# EAGLE board zegarek_v1.3 (EAGLE 6.2)
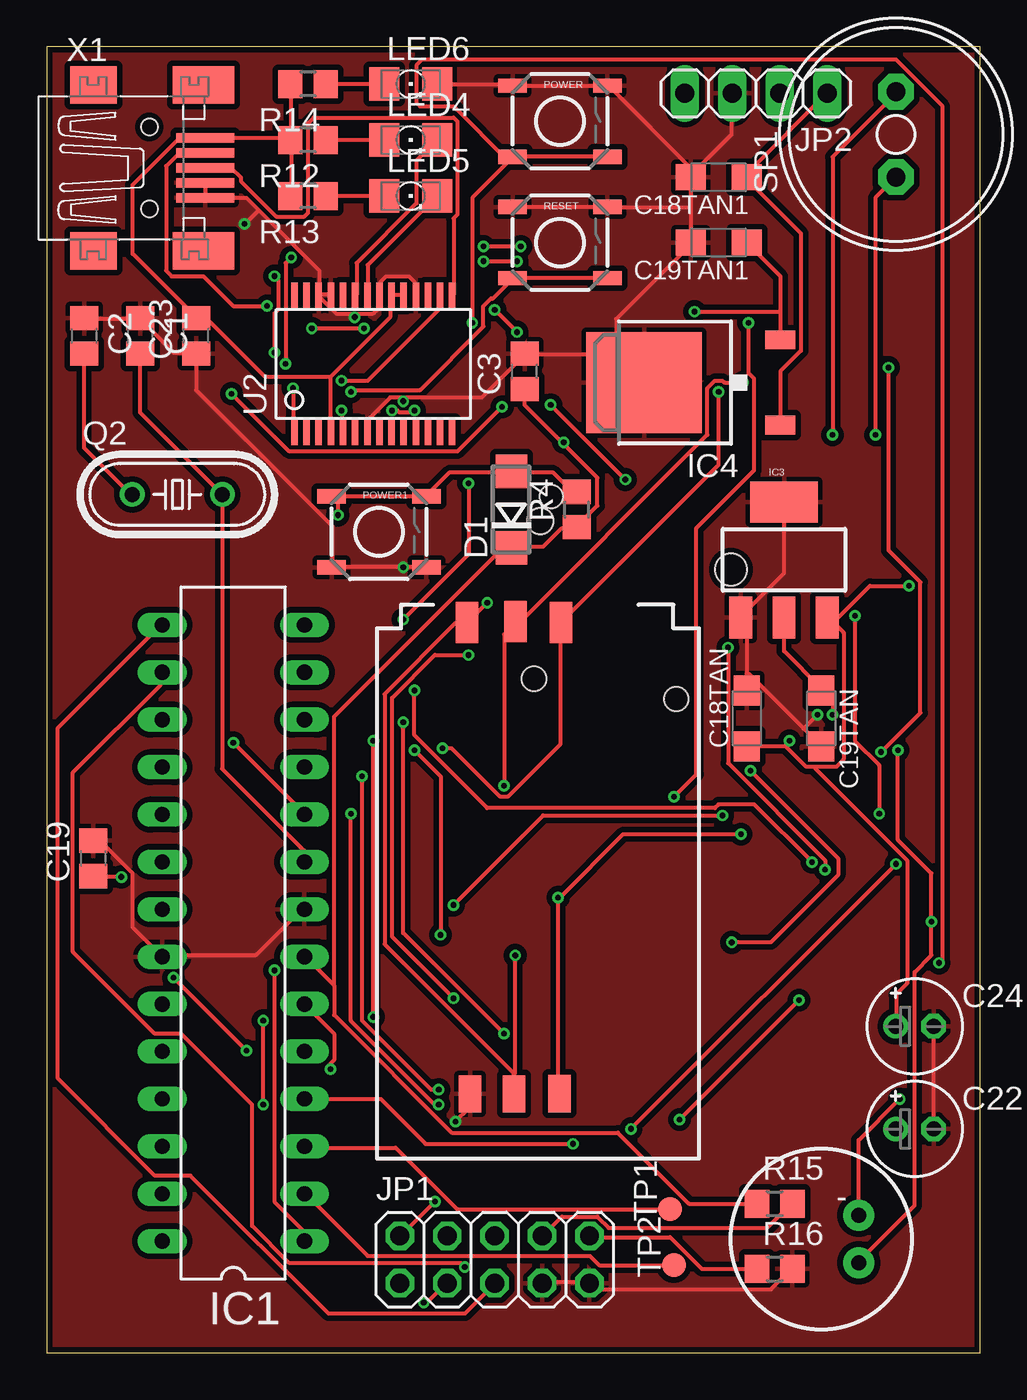
[diagram p0: board, top side]
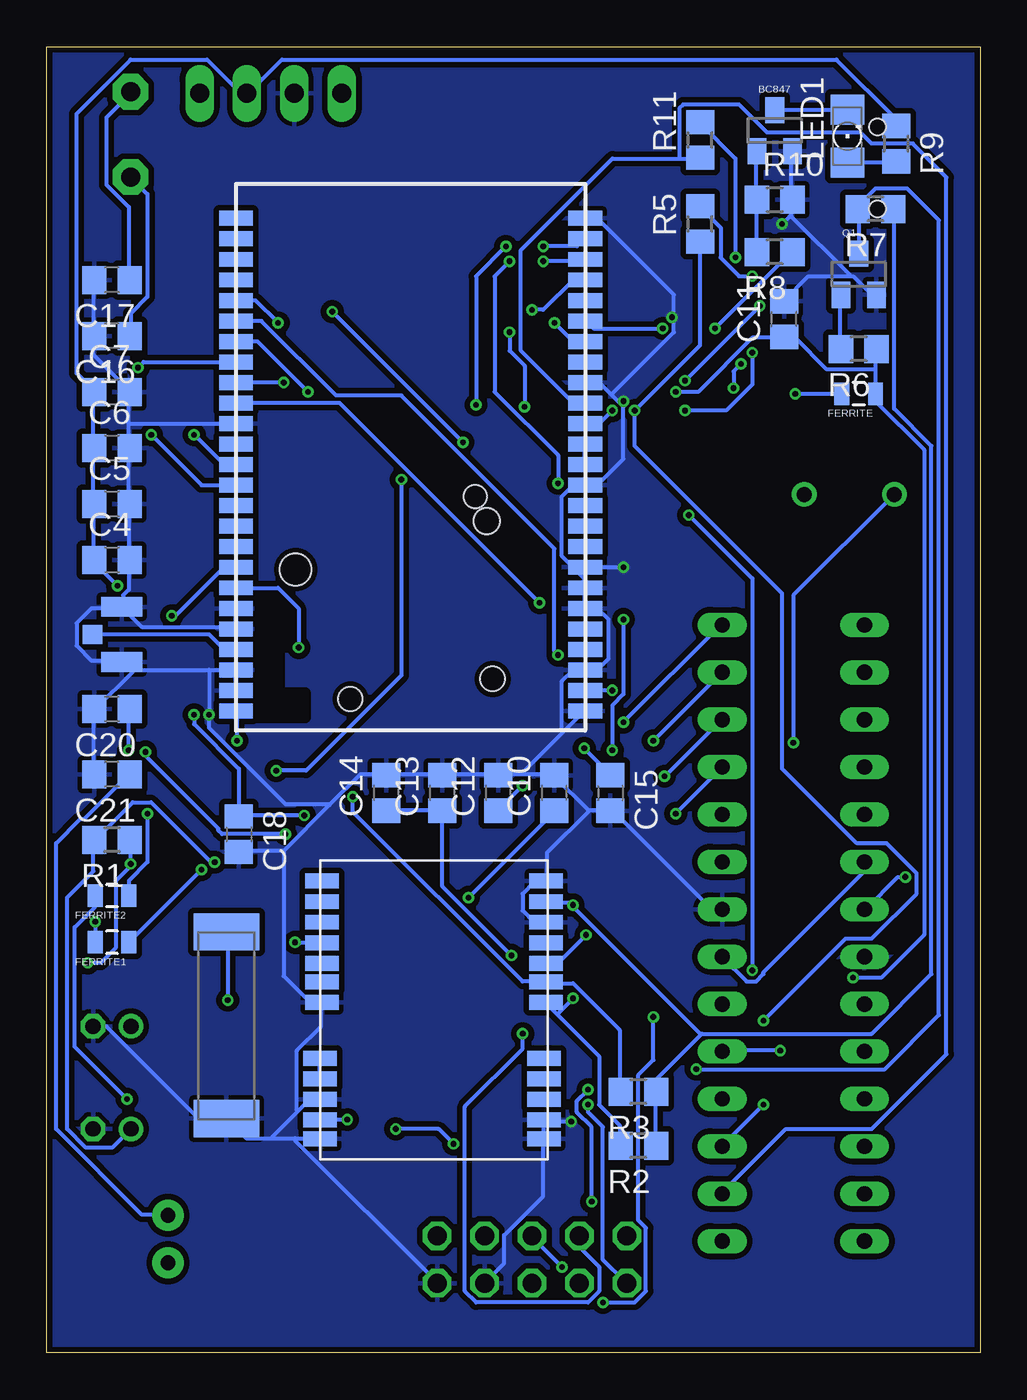
[diagram p1: board, bottom side, seen from below]

Size 50 x 70 mm. Coordinates in mm from the lower left corner, seen from the top.
Outline: 0,0 50,0 50,70 0,70 0,0
Copper layers (1*16): Top 0.035mm / dielectric 1.5mm / Bottom 0.035mm
Design rules: minimum track width 6mil, minimum drill 12mil, track to track 6mil, track to pad 6mil, pad to pad 6mil, via to via 6mil, smd to smd 0mil, copper to edge 10mil, drill to drill 10mil, minimum pad ring 10mil, minimum via ring 6mil, stop-mask expansion 2mil, vias tented up to drill 100mil, thermal gap 10mil
Net classes: 0 default: width 0.203 mm

## Footprints (pad centres in the part's own frame; a part is rotated, then mirrored left to right if it is on the bottom)
SOT23 = smd 1 x 1.4: 1 -0.95,-1.1; 2 0.95,-1.1; 3 0,1.1
C0805 = smd 1.3 x 1.5: 1 -0.95,0; 2 0.95,0
SMC_A = smd 1.6 x 1.4: + -1.5,0; - 1.5,0
E2-5 = drill 0.813 pad 1.27: + -1.016,0 | drill 0.813 pad 1.27 octagon: - 1.016,0
DO214AC = smd 1.8 x 1.7: A 2.05,0; C -2.05,0
0805 = smd 0.8 x 1.2: 1 -0.9,0; 2 0.9,0
LEON-G100/G200 = smd 1.8 x 0.8: 1 -9.35,13.6; 2 -9.35,12.5; 3 -9.35,11.4; 4 -9.35,10.3; 5 -9.35,9.2; 6 -9.35,8.1; 7 -9.35,7; 8 -9.35,5.9; 9 -9.35,4.8; 10 -9.35,3.7; 11 -9.35,2.6; 12 -9.35,1.5; 13 -9.35,0.4; 14 -9.35,-0.7; 15 -9.35,-1.8; 16 -9.35,-2.9; 17 -9.35,-4; 18 -9.35,-5.1; 19 -9.35,-6.2; 20 -9.35,-7.3; 21 -9.35,-8.4; 22 -9.35,-9.5; 23 -9.35,-10.6; 24 -9.35,-11.7; 25 -9.35,-12.8; 26 9.35,-12.8; 27 9.35,-11.7; 28 9.35,-10.6; 29 9.35,-9.5; 30 9.35,-8.4; 31 9.35,-7.3; 32 9.35,-6.2; 33 9.35,-5.1; 34 9.35,-4; 35 9.35,-2.9; 36 9.35,-1.8; 37 9.35,-0.7; 38 9.35,0.4; 39 9.35,1.5; 40 9.35,2.6; 41 9.35,3.7; 42 9.35,4.8; 43 9.35,5.9; 44 9.35,7; 45 9.35,8.1; 46 9.35,9.2; 47 9.35,10.3; 48 9.35,11.4; 49 9.35,12.5; 50 9.35,13.6 | hole 1.31: -4.39,11.88 | hole 1.29: 3.23,12.96 | hole 1.7: 6.16,6.02 | hole 1.4: -4.07,3.42 | hole 1.24: -3.47,2.12
GPS1003 = smd 3.5 x 2: FEED 0.23,4.96; GND 0.23,-5.04
DIL28-3 = drill 0.813 long: 1 -16.51,-3.81; 2 -13.97,-3.81; 3 -11.43,-3.81; 4 -8.89,-3.81; 5 -6.35,-3.81; 6 -3.81,-3.81; 7 -1.27,-3.81; 8 1.27,-3.81; 9 3.81,-3.81; 10 6.35,-3.81; 11 8.89,-3.81; 12 11.43,-3.81; 13 13.97,-3.81; 14 16.51,-3.81; 15 16.51,3.81; 16 13.97,3.81; 17 11.43,3.81; 18 8.89,3.81; 19 6.35,3.81; 20 3.81,3.81; 21 1.27,3.81; 22 -1.27,3.81; 23 -3.81,3.81; 24 -6.35,3.81; 25 -8.89,3.81; 26 -11.43,3.81; 27 -13.97,3.81; 28 -16.51,3.81
SOT223 = smd 1.219 x 2.235: 1 -2.311,-3.099; 2 0,-3.099; 3 2.311,-3.099 | smd 3.6 x 2.2: 4 0,3.099
DPACK_3 = smd 1 x 1.6: 1 -2.28,-4.8; 3 2.28,-4.8 | smd 5.4 x 6.2: 4 0,2.5
2X05 = drill 1.016 octagon: 1 -5.08,-1.27; 2 -5.08,1.27; 3 -2.54,-1.27; 4 -2.54,1.27; 5 0,-1.27; 6 0,1.27; 7 2.54,-1.27; 8 2.54,1.27; 9 5.08,-1.27; 10 5.08,1.27
1X04 = drill 1.016 long: 1 -3.81,0; 2 -1.27,0; 3 1.27,0; 4 3.81,0
1206 = smd 1.6 x 1.803: A -1.422,0; C 1.422,0
TACTILE_SWITCH_SMD = smd 1.524 x 0.762: 1 -2.54,1.905; 2 2.54,1.905; 3 -2.54,-1.905; 4 2.54,-1.905
HC49/S = drill 0.813: 1 -2.413,0; 2 2.413,0
R0805 = smd 1.3 x 1.5: 1 -0.95,0; 2 0.95,0
AL11P = drill 1.016 pad 1.905 octagon: + 2.286,0; - -2.286,0
TP13R = smd 1.3 x 1.3: TP 0,0
SSOP28DB = smd 0.348 x 1.397: 1 -4.225,-3.656; 2 -3.575,-3.656; 3 -2.925,-3.656; 4 -2.275,-3.656; 5 -1.625,-3.656; 6 -0.975,-3.656; 7 -0.325,-3.656; 8 0.325,-3.656; 9 0.975,-3.656; 10 1.625,-3.656; 11 2.275,-3.656; 12 2.925,-3.656; 13 3.575,-3.656; 14 4.225,-3.656; 15 4.225,3.656; 16 3.575,3.656; 17 2.925,3.656; 18 2.275,3.656; 19 1.625,3.656; 20 0.975,3.656; 21 0.325,3.656; 22 -0.325,3.656; 23 -0.975,3.656; 24 -1.625,3.656; 25 -2.275,3.656; 26 -2.925,3.656; 27 -3.575,3.656; 28 -4.225,3.656
SIMHOLDER3 = smd 2.2 x 1.2: 1 0.95,4.81; 2 0.91,7.41; 3 0.95,9.86 | smd 2 x 1.2: 4 26.2,9.78; 5 26.22,7.34; 6 26.22,4.98
MIC-9.7MM = drill 0.8 pad 1.676: 1 -2,1.27; 2 -2,-1.27
RF-IPX1 = smd 1 x 1.05: FEED 0,-1.05 | smd 1.05 x 2.2: GND 1.475,0.525; GND1 -1.475,0.525
NEO-6M = smd 0.8 x 1.8: CFG_GPS0/SCK -3.32,-6.15; EXTINT0 3.98,5.75; GND -4.42,5.85; GND1 -6.52,5.85; GND2 -6.52,-6.15; GND3 7.28,-6.25; MISO/CFG_COM1 -4.42,-6.15; MOSI/CFG_COM0 -5.52,-6.15; RESERVED 7.28,5.75; RESERVED1 -2.22,5.85; RESERVED2 -2.22,-6.15; RF_IN -5.52,5.85; RXD1 3.98,-6.25; SCL2 1.88,-6.25; SDA2 0.78,-6.25; SS_N 6.18,5.75; TIMEPULSE 5.08,5.75; TXD1 2.88,-6.25; USB_DM 2.88,5.75; USB_DP 1.88,5.75; V_BCKP 5.08,-6.25; VCC 6.18,-6.25; VCC_REF -3.32,5.85; VDD_USB 0.78,5.75
32005-301 = smd 3.1 x 0.5: 1 3,1.6; 2 3,0.8; 3 3,0; 4 3,-0.8; 5 3,-1.6 | smd 2.5 x 2: M1 -3,-4.45; M2 -3,4.45 | smd 3.3 x 2: M3 2.9,4.45; M4 2.9,-4.45 | hole 0.9: 0,2.2; 0,-2.2

## Placement (x,y rotation side)
BC847  [SOT23]  11,65.5 0 bottom
C1  22pF  [C0805]  5,54.5 270 top
C2  22pF  [C0805]  2,54.5 270 top
C3  100nF  [C0805]  25.6,52.6 90 top
C4  39pF  [C0805]  46.5,42.5 0 bottom
C5  10pF  [C0805]  46.5,45.5 0 bottom
C6  10nF  [C0805]  46.5,48.5 0 bottom
C7  100nF  [C0805]  46.5,51.5 0 bottom
C10  47pF  [C0805]  22.8,30 90 bottom
C11  47pF  [C0805]  10.5,55.4 90 bottom
C12  47pF  [C0805]  25.8,30 90 bottom
C13  47pF  [C0805]  28.8,30 90 bottom
C14  100nF  [C0805]  31.8,30 90 bottom
C15  47pF  [C0805]  19.8,30 270 bottom
C16  27pF  [C0805]  46.5,54.5 180 bottom
C17  27pF  [C0805]  46.5,57.5 180 bottom
C18  100nF  [C0805]  39.7,27.8 270 bottom
C18TAN  10uF  [SMC_A]  37.5,34 90 top
C18TAN1  10uF  [SMC_A]  36,63 180 top
C19  100nF  [C0805]  2.5,26.5 90 top
C19TAN  10uF  [SMC_A]  41.5,34 270 top
C19TAN1  10uF  [SMC_A]  36,59.5 180 top
C20  27pF  [C0805]  46.5,34.5 180 bottom
C21  27pF  [C0805]  46.5,31 180 bottom
C22  [E2-5]  46.5,12 0 top
C23  100nF  [C0805]  8,54.5 90 top
C24  [E2-5]  46.5,17.5 0 top
D1  GS1B  [DO214AC]  24.9,45.2 90 top
FERRITE  [0805]  6.5,51.4 180 bottom
FERRITE1  82nH  [0805]  46.5,22 180 bottom
FERRITE2  82nH  [0805]  46.5,24.5 180 bottom
G1  LEON-G100/G200  [LEON-G100/G200]  30.5,48 180 bottom
GPS1003  GPS1003  [GPS1003]  40.6,17.6 0 bottom
IC1  MEGA8-P  [DIL28-3]  10,22.5 90 top
IC3  LM1117S-3.3  [SOT223]  39.5,42.5 0 top
IC4  NCV78M05BDTRKG  [DPACK_3]  34.5,52 90 top
JP1  [2X05]  24,5 0 top
JP2  [1X04]  38,67.5 180 top
LED1  [1206]  7.1,65.2 90 bottom
LED4  [1206]  19.5,65 0 top
LED5  [1206]  19.5,62 0 top
LED6  [1206]  19.5,68 0 top
POWER  [TACTILE_SWITCH_SMD]  27.5,66 0 top
POWER1  [TACTILE_SWITCH_SMD]  17.8,44 0 top
Q1  [SOT23]  6.5,57.8 0 bottom
Q2  [HC49/S]  7,46 0 top
R1  100k  [R0805]  46.5,27.5 180 bottom
R2  4.7k  [R0805]  18.3,11.1 180 bottom
R3  4.7k  [R0805]  18.3,14 180 bottom
R4  22k  [R0805]  28.4,45.2 90 top
R5  1k  [R0805]  15,60.5 90 bottom
R6  330k  [R0805]  6.5,53.8 180 bottom
R7  22k  [R0805]  5.6,61.3 180 bottom
R8  10k  [R0805]  11,59 180 bottom
R9  820  [R0805]  4.5,64.8 270 bottom
R10  47k  [R0805]  11,61.8 0 bottom
R11  1k  [R0805]  15,65 90 bottom
R12  330  [R0805]  14,65 180 top
R13  330  [R0805]  14,62 180 top
R14  330  [R0805]  14,68 180 top
R15  1k5  [R0805]  39,8 0 top
R16  2k  [R0805]  39,4.5 0 top
RESET  [TACTILE_SWITCH_SMD]  27.5,59.5 0 top
SP1  AL11P  [AL11P]  45.5,65.3 90 top
TP1  TPTP13R  [TP13R]  33.4,7.7 90 top
TP2  TPTP13R  [TP13R]  33.6,4.7 90 top
U2  [SSOP28DB]  17.5,53 0 top
U$5  SIMHOLDER3  [SIMHOLDER3]  17.7,40.1 270 top
U$6  MIC9.7MM  [MIC-9.7MM]  41.5,6.1 180 top
U$7  RFIPX1  [RF-IPX1]  46.5,38.5 270 bottom
U$9  NEO-6M  [NEO-6M]  29.5,18 90 bottom
X1  MINI-USB-32005-301  [32005-301]  5.5,63.5 0 top

## Library data of the parts
BC847 FERRITE FERRITE1 FERRITE2 IC3 POWER POWER1 Q1 RESET U$5 U$6 = SparkFun
C1-C7 C10-C18 C18TAN C18TAN1 C19 C19TAN C19TAN1 C20-C24 R1-R16 = rcl
D1 = diode
G1 = u-blox-1; OC_FARNELL: unknown; OC_NEWARK: unknown
GPS1003 U$9 = u-blox_NEO-6M
IC1 = atmel; OC_FARNELL: unknown; OC_NEWARK: unknown
IC4 = linear
JP1 JP2 = pinhead
LED1 LED4-LED6 = led
Q2 = crystal; OC_FARNELL: 1667008; OC_NEWARK: unknown
SP1 = buzzer; OC_FARNELL: unknown; OC_NEWARK: unknown
TP1 TP2 = testpad
U2 = ftdichip-5
U$7 = RFIPX
X1 = con-cypressindustries; OC_FARNELL: unknown; OC_NEWARK: unknown

## Nets
+3V0: C18.1 C19TAN.+ IC3.2 R2.1 R3.1 R7.1 U$9.VCC
+5V0: C3.1 C19TAN1.+ D1.C IC1.7 IC1.20 IC4.3 R4.1 R15.1
EXTINT0: G1.24 U$9.EXTINT0
GND: BC847.2 C1.1 C2.1 C3.2 C4.2 C5.2 C6.2 C7.2 C10.2 C11.2 C12.2 C13.2 C14.2 C15.2 C16.2 C17.2 C18.2 C18TAN1.- C18TAN.- C19.2 C19TAN1.- C19TAN.- C20.2 C21.2 C22.- C23.1 C24.- G1.1 G1.3 G1.6 G1.7 G1.8 G1.12 G1.17 G1.25 G1.36 G1.45 G1.46 G1.48 G1.49 GPS1003.GND IC1.8 IC1.22 IC3.1 IC3.4 IC4.4 JP1.7 JP1.9 JP2.3 LED6.C POWER1.3 POWER1.4 POWER.1 POWER.2 Q1.2 R10.2 R16.2 RESET.1 RESET.2 U2.7 U2.18 U2.21 U2.25 U2.26 U$5.6 U$7.GND U$7.GND1 U$9.GND U$9.GND1 U$9.GND2 U$9.GND3 U$9.MOSI/CFG_COM0 U$9.V_BCKP U$9.VDD_USB X1.4 X1.5
LCD1: IC1.11 JP1.1
LCD2: IC1.12 JP1.2
LCD3: IC1.13 JP1.3
LCD4: IC1.14 JP1.4
LCD5: IC1.15 JP1.5
LCD6: IC1.16 JP1.6
LEON_POWER: G1.19 IC1.4 POWER.3 POWER.4 R1.1
LEON_RESET: C11.1 FERRITE.1 IC1.5 R6.1 RESET.3 RESET.4
LEON_RESET?: IC1.6 Q1.3 R7.2
LEON_RXD: G1.16 IC1.2 R11.1 TP2.TP
LEON_TXD: G1.15 IC1.3 R5.1 TP1.TP
N$1: FERRITE.2 G1.22
N$2: C2.2 IC1.10 Q2.1
N$3: C22.+ G1.2 R1.2
N$4: C13.1 C14.1 G1.35 U$5.1 U$5.5
N$5: C15.1 G1.32 U$5.3
N$6: C12.1 G1.34 U$5.2
N$7: C16.1 G1.39 SP1.-
N$8: C10.1 G1.33 U$5.4
N$9: C17.1 G1.38 SP1.+
N$10: G1.13 G1.14
N$11: FERRITE1.1 G1.44
N$12: FERRITE2.1 G1.43
N$13: C20.1 FERRITE1.2 U$6.1
N$14: C21.1 FERRITE2.2 U$6.2
N$15: Q1.1 R6.2
N$16: BC847.1 R8.2 R10.1
N$17: LED1.A R9.2
N$18: BC847.3 LED1.C
N$19: G1.20 R8.1
N$20: G1.47 U$7.FEED
N$23: GPS1003.FEED U$9.RF_IN
N$24: G1.31 R2.2 U$9.SDA2
N$25: U$9.RESERVED1 U$9.VCC_REF
N$26: G1.30 R3.2 U$9.SCL2
N$27: G1.23 U$9.TXD1
N$28: C1.2 IC1.9 Q2.2
N$29: D1.A IC1.1 POWER1.1 POWER1.2 R4.2
N$30: C19.1 IC1.21
N$31: LED4.A R12.1
N$32: LED5.A R13.1
N$33: LED4.C U2.23
N$34: LED5.C U2.22
N$35: R11.2 U2.1
N$36: R5.2 U2.5
N$37: JP1.10 R16.1
N$38: JP1.8 R15.2
N$40: JP2.4
N$47: C23.2 R12.2 R13.2 R14.2 U2.4 U2.19 U2.20 X1.1
N$48: U2.16 X1.2
N$49: U2.15 X1.3
N$51: LED6.A R14.1
VBAT: C4.1 C5.1 C6.1 C7.1 C18TAN.+ C24.+ G1.50 IC3.3 JP2.2 R9.1
VIN: C18TAN1.+ IC4.1 JP2.1

## Tracks (layer width: path | path; a pad name or v marks a point on that pad's centre or on a via)
+3V0  (via drill 0.3)
  Top 0.203: v42.1,34.2 42.1,34.9 C19TAN.+ 41.5,35.6 39.5,37.6 IC3.2 | v36.2,28.8 26.6,28.8 v21.8,24
  Bottom 0.203: v42.1,34.2 42.1,33.7 39.7,31.3 C18.1 39.6,28.8 v36.2,28.8 | R2.1 17.4,11.1 17.4,14 R3.1 17.4,14.1 17.4,14.6 14.9,17.1 | 14.9,17.1 5.8,17.1 2.6,20.3 2.6,48.6 4.6,50.6 4.6,61.3 R7.1 | 21.85,23.95 15,17.1 14.9,17.1 | 21.85,23.95 22,24.1 23.2,24.1 U$9.VCC | v21.8,24 21.85,23.95
+5V0  (via drill 0.3)
  Top 0.203: 39.3,55.8 39.3,57.7 C19TAN1.+ | 39.3,55.8 IC4.3 | C3.1 25.6,50.8 27.65,48.75 | 27.65,48.75 29.5,46.9 29.5,45.4 28.4,44.3 R4.1 28.4,44.2 27.6,44.2 26.6,43.2 24.9,43.2 D1.C 24.8,43.2 24.5,43.2 15.4,34.1 15.4,19.7 | v34.7,55.8 39.3,55.8 | v27.7,48.8 27.65,48.75 | R15.1 34.4,8 30.6,11.8 21.7,11.8 15.4,18.1 15.4,19.7 | 15.4,19.7 13.9,21.2 IC1.7
  Bottom 0.203: v27.7,48.8 v34.7,55.8 | IC1.20 6.2,25.8 11.6,20.4 11.6,20.3 12,19.9 12.5,19.9 13.8,21.2 IC1.7
EXTINT0  (via drill 0.3)
  Top 0.203: v36.7,22 38.8,22 42.4,25.6 42.4,26.5 v37.7,31.2 | v27,50.8 v31,46.8 | v23.4,59.3 v25.4,59.3
  Bottom 0.203: v36.7,22 35.3,22 U$9.EXTINT0 | v37.7,31.2 36.1,31.2 31,36.3 v31,46.8 | v27,50.8 27,57.7 v25.4,59.3 | v23.4,59.3 21.6,59.3 21.2,59.7 G1.24
GND  (via drill 0.3)
  Top 0.203: 19.1,51.2 23.3,51.2 25.6,53.5 C3.2 25.7,53.5 30.5,53.5 IC4.4 30.5,53.6 30.5,55.4 34.5,59.4 C19TAN1.- 34.5,61.4 | 19.1,51.2 18.4,51.2 17.2,50 17.2,49.4 U2.7 | LED6.C 24.9,68 POWER.1 25,67.9 30,67.9 POWER.2 30.1,67.9 34.7,63.3 | C18TAN1.- 34.5,61.4 | RESET.1 25,61.4 30,61.4 RESET.2 30.1,61.4 34.5,61.4 | 34.7,63.3 34.5,63.1 C18TAN1.- | 34.7,63.3 36.7,65.3 36.7,67.5 JP2.3 | 34.7,63.3 C18TAN1.- | POWER1.4 20.3,42.1 v19.1,42.1 15.3,42.1 POWER1.3 15.3,42.2 15.3,44.3 8,51.6 C23.1 8,53.6 6.8,53.6 5,55.4 C1.1 4.9,55.4 2,55.4 C2.1 | U2.26 14.6,56.7 15.2,56.7 U2.25 | 16.5,55.7 15.5,55.7 14.6,56.6 U2.26 | 16.5,55.7 17.5,55.7 17.8,56 17.8,56.6 U2.21 17.9,56.7 17.9,57.4 18.2,57.7 19.4,57.7 19.7,57.4 19.7,56.7 U2.18 | X1.4 X1.5 10.7,61.9 11.35,61.25 | 11.35,61.25 14.6,58 14.6,56.8 U2.26 | 11.35,61.25 v10.6,60.5 | v16.5,55.5 16.5,55.7 | v19.1,51 19.1,51.2 | 37.5,36.4 37.5,39.1 IC3.1 37.2,39.5 39.5,41.8 IC3.4 | 37.5,36.4 C18TAN.- | 40.55,33.45 37.6,36.4 37.5,36.4 | 40.55,33.45 C19TAN.- | v41.3,34.2 40.55,33.45 | R16.2 39.9,4.5 38.8,3.4 29.4,3.4 29.1,3.7 JP1.9 29,3.8 26.6,3.8 JP1.7 | v21.9,12.4 22.6,13.1 22.6,13.8 U$5.6 | C22.- 47.5,12 47.5,17.5 C24.- | C19.2 2.5,27.4 2.9,27.4 4.6,25.7 4.6,22.8 6.1,21.3 IC1.22 | 6.2,21.3 IC1.22 | 13.8,23.8 IC1.8 13.7,23.8 11.2,21.3 6.3,21.3 IC1.22
  Bottom 0.203: BC847.2 10.1,64.4 10.1,61.8 R10.2 10.1,61.7 10.1,60.9 | Q1.2 5.8,56.7 6.8,57.7 7,57.7 | 7,57.7 9.2,57.7 10.5,56.4 C11.2 | 10.1,60.9 7,57.8 7,57.7 | v10.6,60.5 10.2,60.9 10.1,60.9 | 21.2,60.8 G1.25 20.5,60.8 16.4,56.7 16.4,55.5 | 21.2,52 G1.17 20.4,52 19.75,51.35 | 21.2,42.1 G1.8 | 21.2,39.9 G1.6 | G1.6 21.2,40 21.2,41 G1.7 21.2,41.1 21.2,41.6 | 21.2,41.6 21.2,42 G1.8 | 21.2,41.6 21.3,41.6 22.4,42.7 22.4,45.9 21.8,46.5 G1.12 20.5,46.5 19.1,47.9 19.1,50.7 19.25,50.85 | 19.25,50.85 19.75,51.35 | 16.4,55.5 16.4,54.7 19.75,51.35 | v16.5,55.5 16.4,55.5 | G1.8 v19.1,42.1 | 19.25,50.85 v19.1,51 | C21.2 47.5,31 47.5,34.5 C20.2 47.4,34.5 45.4,36.5 45.4,36.6 | G1.49 39.9,35.5 39.9,36.6 G1.48 41.3,36.6 | 45.4,36.6 45.5,36.6 45.9,37 U$7.GND 46,37.1 47.6,37.1 48.4,37.9 48.4,39.1 47.6,39.9 46,39.9 U$7.GND1 | 45.4,36.6 41.3,36.6 | 39.9,38.8 G1.46 | G1.46 39.9,38.9 39.9,39.9 G1.45 | U$7.GND1 44.9,38.9 40,38.9 G1.46 | C17.2 47.5,57.5 47.5,54.5 C16.2 47.5,54.4 47.5,53.5 45.6,51.6 C7.2 45.6,51.5 45.6,49.8 | 45.6,49.8 45.6,48.6 C6.2 45.6,48.5 45.6,45.6 C5.2 45.6,45.5 45.6,42.5 C4.2 45.6,42.4 45.6,40.9 45.9,40.6 45.9,40 U$7.GND1 | 45.6,49.8 G1.36 | 41.3,36.6 v41.3,34.2 41.3,33.5 37.2,29.4 34.9,29.4 34.85,29.35 | v21.9,12.4 23.3,12.4 U$9.MOSI/CFG_COM0 23.4,12.4 23.4,11.5 U$9.GND2 23.4,11.4 23.4,8.4 25.5,6.3 25.5,4.8 26.5,3.8 JP1.7 | 37.9,11.5 39.3,11.5 40.3,12.5 GPS1003.GND 40.4,12.6 41.9,12.6 46.8,17.5 C24.- | 37.9,11.5 36.7,11.5 | 36.7,11.5 35.4,11.5 U$9.GND1 | 36.55,12.95 37.9,11.6 37.9,11.5 | 36.55,12.95 36,13.5 35.4,13.5 U$9.GND | 36.55,12.95 36.6,13 36.6,16.2 35.3,17.5 35.3,18.7 U$9.VDD_USB 35.4,18.7 35.8,18.7 37.3,20.2 37.3,26.9
  Bottom 0.203: U$9.V_BCKP 23.3,23.1 23.9,23.1 24.5,23.7 24.5,24.6 23.9,25.2 23.3,25.2 U$9.GND3 23.2,25.3 23.2,26.8 21,29 21,29.1 | 21.2,36.6 G1.3 | 21,29.1 19.8,29.1 C15.2 19.7,29.1 14.4,23.8 13.9,23.8 IC1.8 | 21,29.1 22.8,30.9 C10.2 22.8,31 24.5,31 | 24.5,31 25.8,31 C12.2 25.9,31 28.8,31 C13.2 28.9,31 31.8,31 C14.2 31.9,31 33.2,31 34.85,29.35 | 37.3,26.9 39.7,26.9 C18.2 | 34.85,29.35 37.3,26.9 | 22.35,33.25 24.5,31.1 24.5,31 | 22.35,33.25 21.2,34.4 G1.1 | G1.3 21.8,36.6 22.4,36 22.4,33.3 22.35,33.25 | JP1.9 29.1,3.8 36.7,11.4 36.7,11.5 | G1.6 20.5,39.9 19.9,39.3 19.9,37.2 20.5,36.6 G1.3
  pour Bottom (isolate 0.305): 0,70 50,70 50,0 0,0
  pour Top (isolate 0.305): 0,70 50,70 50,0 0,0
LCD1  (via drill 0.3)
  Top 0.203: v16.3,28.9 16.3,17.8 20.8,13.3 v21,13.3
  Bottom 0.203: v16.3,28.9 IC1.11 | v21,13.3 21,12.9 20.2,12.1 20.2,5 19,3.8 JP1.1
LCD2  (via drill 0.3)
  Top 0.203: v16.9,30.9 16.9,17.8 20.6,14.1 v21,14.1 | v20.8,8.1 19,6.3 JP1.2
  Bottom 0.203: v16.9,30.9 13.9,33.9 IC1.12 | v21,14.1 21.6,13.5 21.6,12.9 20.8,12.1 v20.8,8.1
LCD3  (via drill 0.3)
  Top 0.203: v17.5,18 v17.5,32.8 | v20.2,2.7 20.4,2.7 21.4,3.7 JP1.3
  Bottom 0.203: v17.5,32.8 13.9,36.4 IC1.13 | v17.5,18 17.5,15.7 18.3,14.9 18.3,7.1 17.9,6.7 17.9,3.3 18.5,2.7 v20.2,2.7
LCD4  (via drill 0.3)
  Top 0.203: v19.1,33.8 19.1,22.5 v24.5,17.1
  Bottom 0.203: v19.1,33.8 13.9,39 IC1.14 | v24.5,17.1 24.5,16.3 27.6,13.2 27.6,3.3 27,2.7 21,2.7 20.4,3.3 20.4,4.6 21.4,5.6 21.4,6.2 JP1.4
LCD5
  Top 0.203: IC1.15 6.1,39 0.6,33.5 0.6,14.7 5.8,9.5 7.7,9.5 15.1,2.1 22.4,2.1 24,3.7 JP1.5
LCD6  (via drill 0.3)
  Top 0.203: v22.4,4.6 22.2,4.8 13,4.8 11,6.8 11,13.3 7.2,17.1 5.8,17.1 1.4,21.5 1.4,31.1 6.1,35.8 6.1,36.4 IC1.16
  Bottom 0.203: v22.4,4.6 24,6.2 JP1.6
LEON_POWER  (via drill 0.3)
  Top 0.203: POWER.3 25,64.1 30,64.1 POWER.4 | v22.8,55.2 22.8,61.9 24.9,64 POWER.3 | v31.3,12 v45.5,26.2 | v28.2,11.2 20.3,11.2 17.9,13.6 13.9,13.6 IC1.4 | v47.8,20.9 48,21.1 48,66.8 45.5,69.3 20.1,69.3 19.8,69 19.8,67 20,66.8 21.8,66.8 24.7,63.9 POWER.3
  Bottom 0.203: G1.19 21.8,54.2 v22.8,55.2 | v31.3,12 29,12 v28.2,11.2 | R1.1 45.5,27.5 v45.5,26.2 45.5,26.1 46.3,25.3 46.3,21.7 47.1,20.9 v47.8,20.9
LEON_RESET  (via drill 0.3)
  Top 0.203: RESET.4 30,57.6 25,57.6 RESET.3 24.9,57.5 23.9,56.5 23.8,56.5 23.4,56.1 23.4,55 20,51.6 16.4,51.6 v16.3,51.5 | v6.8,20.1 v10.7,16.2
  Bottom 0.203: 5.6,52.7 5.6,53.8 R6.1 | 5.6,52.7 FERRITE.1 5.6,51 3,48.4 3,22.4 5.3,20.1 v6.8,20.1 | 5.6,52.7 8.2,52.7 9.9,54.4 10.5,54.4 C11.1 10.6,54.4 12.2,54.4 15.1,51.5 v16.3,51.5 | v10.7,16.2 13.8,16.2 IC1.5
LEON_RESET?  (via drill 0.3)
  Top 0.203: v15.2,15.2 15.2,15.5 15.4,15.7 15.4,17.1 IC1.6
  Bottom 0.203: Q1.3 6.5,61.3 R7.2 6.5,61.4 6.3,61.6 6.3,61.7 5.6,62.4 3.9,62.4 2.2,60.7 2.2,18.1 5.1,15.2 v15.2,15.2
LEON_RXD
  Top 0.203: TP2.TP 29.6,4.7 29.1,5.2 17.2,5.2 13.9,8.5 IC1.2
  Bottom 0.203: 16.1,64 19.7,64 24.6,59.1 24.6,53.7 21.8,50.9 G1.16 | 16.1,64 15,64 R11.1 | 16.1,64 16.1,66.7 15.9,66.9 12.9,66.9 11.4,65.4 6.4,65.4 5.8,64.8 3.6,64.8 1.8,63 1.8,16 5.8,12 10.4,12 13.8,8.6 IC1.2
LEON_TXD  (via drill 0.3)
  Top 0.203: v18.5,50.5 18.8,50.5 18.9,50.4 19.6,50.4 v19.7,50.5 | TP1.TP 22,7.7 18.7,11 13.9,11 IC1.3 | v11.6,13.3 v11.6,17.8
  Bottom 0.203: R5.1 15,54 v18.5,50.5 18.5,48.6 10.6,40.7 10.6,31.3 6.6,27.3 5,27.3 3.4,25.7 3.4,24.6 5.8,22.2 7.2,22.2 v11.6,17.8 | v19.7,50.5 20.4,49.8 G1.15 | v11.6,13.3 13.8,11.1 IC1.3
N$1  (via drill 0.3)
  Top 0.203: v9.9,51.4 13,48.3 22,48.3 v24.4,50.7 | v24,55.9 v25.2,54.7
  Bottom 0.203: v9.9,51.4 FERRITE.2 | v24.4,50.7 24.4,52.9 25.2,53.7 v25.2,54.7 | v24,55.9 23.4,55.9 21.8,57.5 G1.22
N$2  (via drill 0.3)
  Top 0.203: C2.2 2,48.5 4.5,46 Q2.1 | v10,32.7 13.8,28.9 IC1.10
  Bottom 0.203: v10,32.7 10,40.6 Q2.1
N$3  (via drill 0.3)
  Top 0.203: v19.7,35.5 19.7,33.1 23.6,29.2 35.8,29.2 36,29.4 37.9,29.4 v41,26.3
  Bottom 0.203: C22.+ 45.5,12 46.5,11 47.9,11 48.9,12 48.9,24.4 47.5,25.8 47.5,27.5 R1.2 47.4,27.5 45.4,29.5 44.4,29.5 41.2,26.3 v41,26.3 | v19.7,35.5 G1.2
N$4  (via drill 0.3)
  Top 0.203: v23.6,40.2 22.6,39.2 U$5.1 22.5,39.1 21.9,39.1 18.1,35.3 18.1,21.9 25,15 | 25,15 25,13.9 U$5.5 | v25.1,21.3 25.1,15 25,15
  Bottom 0.203: C14.1 31.8,29.1 28.8,29.1 C13.1 28.8,25 v25.1,21.3 | G1.35 34.3,50.9 v23.6,40.2
N$5  (via drill 0.3)
  Top 0.203: v21.2,32.4 21.7,32.4 24.3,29.8 24.7,29.8 27.5,32.6 27.5,39.1 U$5.3 27.6,39.2 36,47.6 v36,51.5
  Bottom 0.203: v21.2,32.4 19.8,31 C15.1 | G1.32 38.7,54.2 v36,51.5
N$6  (via drill 0.3)
  Top 0.203: v24.5,30.4 24.5,38.5 25.1,39.1 U$5.2 24.6,38.4 35.4,49.2 35.4,51.7 35.8,52.1 36.2,52.1 36.3,52 v37.3,52
  Bottom 0.203: v24.5,30.4 25.8,29.1 C12.1 | v37.3,52 G1.34
N$7  (via drill 0.3)
  Top 0.203: v44.4,49.2 44.4,61.9 SP1.-
  Bottom 0.203: C16.1 45.5,54.5 45.5,55.7 44.6,56.6 44.6,62.1 SP1.- | G1.39 41.7,46.5 v44.4,49.2
N$8  (via drill 0.3)
  Top 0.203: U$5.4 27.4,13.9 v27.4,24.4 27.5,24.4 30.9,27.8 v37.2,27.8 | v45.1,52.8 45.1,43 46.8,41.3 46.8,34.3 v44.7,32.2
  Bottom 0.203: v27.4,24.4 22.8,29 C10.1 | G1.33 44.8,53.1 v45.1,52.8 | v44.7,32.2 44.7,32 40.8,28.1 40.8,28 40.6,27.8 v37.2,27.8
N$9  (via drill 0.3)
  Top 0.203: v42.1,49.2 42.1,64.1 45.5,67.5 SP1.+
  Bottom 0.203: C17.1 45.6,57.5 45.6,61.4 46.8,62.6 46.8,66.2 45.5,67.5 SP1.+ | G1.38 40.5,47.6 v42.1,49.2
N$10
  Bottom 0.203: G1.13 21.2,47.6 21.2,48.7 G1.14
N$11  (via drill 0.3)
  Top 0.203: v41.7,25.9 41.7,26.4 36.5,31.6 v36.5,37.8
  Bottom 0.203: v41.7,25.9 FERRITE1.1 | v36.5,37.8 36.5,39.9 37.6,41 G1.44
N$12  (via drill 0.3)
  Top 0.203: v44.6,28.9 44.6,31.5 43.3,32.8 v43.3,39.5
  Bottom 0.203: FERRITE2.1 45.6,25.3 44.6,26.3 v44.6,28.9 | v43.3,39.5 43.1,39.5 40.5,42.1 G1.43
N$13  (via drill 0.3)
  Top 0.203: U$6.1 43.5,4.9 46.5,7.9 46.5,20.4 47.4,21.3 v47.4,23.1 47.4,25.7 45.6,27.5 v45.6,32.3
  Bottom 0.203: v47.4,23.1 FERRITE1.2 | v45.6,32.3 45.6,34.5 C20.1
N$14  (via drill 0.3)
  Top 0.203: v45.7,13.6 43.5,11.4 U$6.2
  Bottom 0.203: FERRITE2.2 47.4,23.9 48.5,22.8 48.5,16.4 v45.7,13.6 | C21.1 45.6,31 48,28.6 48.2,28.6 49.5,27.3 49.5,12 44.9,7.4 43.5,7.4 U$6.2
N$15
  Bottom 0.203: Q1.1 7.5,56.7 7.5,53.8 R6.2
N$16
  Bottom 0.203: BC847.1 12,64.4 12,61.8 R10.1 12,61.7 12,59 R8.2
N$17
  Bottom 0.203: R9.2 4.5,63.8 7.1,63.8 LED1.A
N$18
  Bottom 0.203: BC847.3 7.1,66.6 LED1.C
N$19  (via drill 0.3)
  Top 0.203: v17,54.9 v14.2,54.9
  Bottom 0.203: v14.2,54.9 10.1,59 R8.1 | v17,54.9 20.7,54.9 21.1,55.3 G1.20
N$20
  Bottom 0.203: U$7.FEED 41.3,38.5 40.5,37.7 G1.47
N$23  (via drill 0.3)
  Top 0.203: v40.3,18.9 v33.9,12.5
  Bottom 0.203: v33.9,12.5 35.3,12.5 U$9.RF_IN | v40.3,18.9 40.3,22.5 GPS1003.FEED
N$24  (via drill 0.3)
  Top 0.203: v22.6,37.4 20.8,37.4 18.5,35.1 18.5,22.3 v21.8,19
  Bottom 0.203: 22.65,18.15 23.2,18.7 U$9.SDA2 | 22.65,18.15 20.4,15.9 20.4,13.3 19.3,12.2 19.3,11.1 R2.2 | G1.31 38.5,55.3 34.5,51.3 31,51.3 22.8,43.1 22.8,37.6 v22.6,37.4 | 22.65,18.15 v21.8,19
N$25
  Bottom 0.203: U$9.VCC_REF 35.4,14.7 35.4,15.7 U$9.RESERVED1
N$26  (via drill 0.3)
  Top 0.203: v37.6,55.2 37.6,52.5 37.9,52.2 37.9,47.3 34.8,44.2 34.8,31 v33.6,29.8
  Bottom 0.203: R3.2 19.3,14 19.3,17.3 21.8,19.8 23.2,19.8 U$9.SCL2 23.3,19.9 24.5,19.9 33.6,29 v33.6,29.8 | G1.30 38.8,56.4 v37.6,55.2
N$27  (via drill 0.3)
  Top 0.203: v21.1,22.4 21.1,30.9 v19.7,32.3 | v19.1,39.3 22.6,42.8 v22.6,46.6 | v23.4,58.5 v25.2,58.5
  Bottom 0.203: v21.1,22.4 22.6,20.9 23.2,20.9 U$9.TXD1 | v19.7,32.3 19.7,34.7 19.1,35.3 v19.1,39.3 | v22.6,46.6 22.6,48.1 26,51.5 26,57.7 v25.2,58.5 | v23.4,58.5 21.3,58.5 21.2,58.6 G1.23
N$28
  Top 0.203: C1.2 5,50.4 Q2.2 9.4,45.9 9.4,31.3 13.8,26.9 13.8,26.4 IC1.9
N$29  (via drill 0.3)
  Top 0.203: R4.2 28.4,46.2 28.1,46.2 27.1,47.2 24.9,47.2 D1.A 24.8,47.2 21.6,47.2 20.4,46 POWER1.2 20.3,45.9 15.3,45.9 POWER1.1 15.6,45.8 v15.6,44.9 | v12.2,20.5 12.2,8.1 13.8,6.5 IC1.1
  Bottom 0.203: v12.2,20.5 12.2,41.5 v15.6,44.9
N$30  (via drill 0.3)
  Top 0.203: v4,25.5 2.5,25.5 C19.1
  Bottom 0.203: v4,25.5 4.4,25.5 6.1,23.8 IC1.21
N$31
  Top 0.203: LED4.A R12.1
N$32
  Top 0.203: LED5.A R13.1
N$33
  Top 0.203: U2.23 16.6,56.7 16.6,58.4 19.8,61.6 19.8,63.9 20.9,65 LED4.C
N$34
  Top 0.203: U2.22 17.2,56.7 17.2,58.3 20.9,62 LED5.C
N$35  (via drill 0.3)
  Top 0.203: v13.2,51.7 13.2,49.4 U2.1 | v12.8,53 12.8,58.4 v13.1,58.7
  Bottom 0.203: v13.2,51.7 13.2,52.6 v12.8,53 | v13.1,58.7 13.1,64 15,65.9 R11.2
N$36  (via drill 0.3)
  Top 0.203: v15.8,50.5 15.8,49.4 U2.5 | v12.2,53.6 12.2,55.7 12.4,55.9 12.4,57.5 v12.2,57.7
  Bottom 0.203: v15.8,50.5 13.6,50.5 12.2,51.9 v12.2,53.6 | v12.2,57.7 12.9,57.7 13.9,58.7 13.9,60.3 15,61.4 R5.2
N$37
  Top 0.203: R16.1 35.1,4.5 33.4,6.2 29.1,6.2 JP1.10
N$38
  Top 0.203: R15.2 39.9,8 38.6,6.7 30.1,6.7 29.5,7.3 27.6,7.3 26.6,6.3 JP1.8
N$47
  Top 0.203: R13.2 13.1,62 13.1,65 R12.2 | R14.2 13.1,68 13.1,65.1 R12.2 | R12.2 13,65.1 X1.1 7.1,65.1 4.6,62.6 4.6,58.9 8,55.5 C23.2 8,55.4 8.6,55.4 11.7,52.3 15.2,52.3 | 15.2,52.3 15.2,49.4 U2.4 | 15.2,52.3 18.4,55.5 18.4,56.6 U2.20 18.5,56.7 19.1,56.7 U2.19
N$48  (via drill 0.3)
  Top 0.203: v15.8,52.1 17.2,52.1 21,55.9 21,56.6 U2.16 | v11.8,56.1 10,56.1 8.4,57.7 6.7,57.7 6.4,58 6.4,63.6 7.1,64.3 X1.2
  Bottom 0.203: v11.8,56.1 v15.8,52.1
N$49
  Top 0.203: X1.3 9.9,63.5 10.4,63 10.4,62.8 12.3,60.9 13.8,60.9 14,61.1 14,65.9 14.3,66.2 21.8,66.2 22,66 22,61 21.8,60.8 21.8,56.7 U2.15
N$51
  Top 0.203: LED6.A R14.1
VBAT  (via drill 0.3)
  Top 0.203: 39.6,32.5 C18TAN.+ | 39.6,32.5 40.7,31.4 41.2,31.4 | 41.2,31.4 42.3,31.4 42.7,31.8 42.7,38.6 41.9,39.4 IC3.3 42.2,39.2 44.1,41.1 v46.2,41.1 | v39.8,32.8 39.6,32.6 39.6,32.5 | C24.+ 45.5,17.5 45.5,19.2 46.1,19.8 46.1,26.4 41.2,31.3 41.2,31.4
  Bottom 0.203: R9.1 4.5,66.1 7.7,69.3 37.4,69.3 39.2,67.5 JP2.2 39.3,67.6 39.7,67.6 41.4,69.3 45.5,69.3 48.4,66.4 48.4,52.5 47.5,51.6 C7.1 47.5,51.5 47.5,48.6 C6.1 47.5,48.5 47.5,45.6 C5.1 47.5,45.5 47.5,42.5 C4.1 47.5,42.4 v46.2,41.1 | v39.8,32.8 39.8,34.4 G1.50
VIN
  Top 0.203: JP2.1 37.5,63.2 C18TAN1.+ 37.5,62.9 40.4,60 40.4,53.7 39.3,52.6 IC4.1